# EAGLE board Lamp Logic Board_5 (EAGLE 9.4.2)

Size 45 x 81 mm. Coordinates in mm from the lower left corner, seen from the top.
Outline: 0,0 45,0 45,81 0,81 0,0
Copper layers (1*16): Top 0.035mm / dielectric 1.5mm / Bottom 0.035mm
Design rules "default": minimum track width 6mil, minimum drill 0.35mm, track to track 6mil, track to pad 6mil, pad to pad 6mil, via to via 6mil, smd to smd 6mil, copper to edge 40mil, drill to drill 6mil, minimum pad ring 10mil, minimum via ring 8mil, stop-mask expansion 4mil, vias tented up to drill 0mil, thermal gap 10mil

## Footprints (pad centres in the part's own frame; a part is rotated, then mirrored left to right if it is on the bottom)
3X8PINHEAD = drill 0.7 octagon: 1 0,0; 2 2.54,0; 3 5.08,0; 4 7.62,0; 5 10.16,0; 6 12.7,0; 7 15.24,0; 8 17.78,0; 9 0,-2.54; 10 2.54,-2.54; 11 5.08,-2.54; 12 7.62,-2.54; 13 10.16,-2.54; 14 12.7,-2.54; 15 15.24,-2.54; 16 17.78,-2.54; 17 0,-5.08; 18 2.54,-5.08; 19 5.08,-5.08; 20 7.62,-5.08; 21 10.16,-5.08; 22 12.7,-5.08; 23 15.24,-5.08; 24 17.78,-5.08
AMASS_XT60-M = drill 4.5 square: 1 -3.6,0 | drill 4.5: 2 3.6,0
SOT223 = smd 1.219 x 2.235: 1 -2.311,-3.099; 2 0,-3.099; 3 2.311,-3.099 | smd 3.6 x 2.2: 4 0,3.099
C0402 = smd 0.7 x 0.9: 1 -0.65,0; 2 0.65,0
C0805 = smd 1.3 x 1.5: 1 -0.95,0; 2 0.95,0
ENP2,0-5 = drill 0.813 pad 1.27 long: 1 -0.953,0; 2 0.953,0
CAP_EEFC_B = smd 2.21 x 1.575: 1 -2.159,0; 2 2.159,0
1X05 = drill 1.016 long: 1 -5.08,0; 2 -2.54,0; 3 0,0; 4 2.54,0; 5 5.08,0
DIL-08 = drill 0.813 long: 1 -3.81,-3.81; 2 -1.27,-3.81; 3 1.27,-3.81; 4 3.81,-3.81; 5 3.81,3.81; 6 1.27,3.81; 7 -1.27,3.81; 8 -3.81,3.81
SPIOLED_STADOFF = drill 0.6 octagon: CLK 18.39,2.5; CS 20.93,2.5; DC 23.47,2.5; DIN 15.85,2.5; GND 13.31,2.5; RST 26.01,2.5; VCC 10.77,2.5 | hole 2.5: 2.5,2.5; 34.5,2.5; 34.5,42.25; 2.75,42.5
R1206 = smd 1.6 x 1.803: 1 -1.422,0; 2 1.422,0
R0603 = smd 1 x 1.1: 1 -0.85,0; 2 0.85,0
0309/12 = drill 0.813 octagon: 1 -6.35,0; 2 6.35,0
EN11-HSM = drill 0.991 pad 1.499: 1 -2.489,7.874; 2 2.489,7.874; 3 0,7.874 | drill 1.092 pad 1.6: 4 -2.489,22.352; 5 2.489,22.352
TACTILE_SWITCH_SMD_6.0X3.5MM = smd 2.3 x 1.6: 1 -3.15,0; 2 3.15,0
TACTILE_SWITCH_SMD_12MM = smd 1.6 x 1.55: 1 6.975,-2.5; 2 -6.975,-2.5; 3 6.975,2.5; 4 -6.975,2.5
CM1624-08DE = smd 0.2 x 0.4: CLK 1,0; CMD 2.2,0; DATA0 0.6,0; DATA1 0.2,0; DATA2 3,0; DATA3 2.6,0; ESD1 1.4,0; ESD2 1.4,1.125; ESD3 1.775,1.125; SDCLK 1,1.125; SDCMD 2.2,1.125; SDDATA0 0.6,1.125; SDDATA1 0.2,1.125; SDDATA2 3,1.125; SDDATA3 2.6,1.125; VCC 1.8,0 | smd 3 x 0.35: GND 1.575,0.575
CON00218_8 = smd 0.813 x 1.676: 1 2.899,-7.387; 2 1.799,-7.387; 3 0.699,-7.387; 4 -0.401,-7.387; 5 -1.501,-7.387; 6 -2.601,-7.387; 7 -3.701,-7.387; 8 -4.801,-7.387 | smd 1.499 x 1.702: 9 -6.751,7.374; 10 6.751,7.374 | smd 1.295 x 1.397: 11 -6.859,1.577 | smd 1.295 x 1.295: 12 -6.859,-5.823 | smd 1.6 x 1.499: 13 -6.201,-7.476 | smd 1.702 x 1.499: 14 6.449,-7.476
2X6PINHEAD = drill 0.6 octagon: CS 6.35,3.81; DTR 1.27,1.27; GND 6.35,1.27; MISO 11.43,3.81; MOSI 8.89,3.81; RTS 1.27,3.81; RX0 8.89,1.27; SCK 3.81,3.81; TX0 11.43,1.27; VCC 3.81,1.27
DW20 = smd 1.981 x 0.559: 1 -4.686,5.715; 2 -4.686,4.445; 3 -4.686,3.175; 4 -4.686,1.905; 5 -4.686,0.635; 6 -4.686,-0.635; 7 -4.686,-1.905; 8 -4.686,-3.175; 9 -4.686,-4.445; 10 -4.686,-5.715; 11 4.686,-5.715; 12 4.686,-4.445; 13 4.686,-3.175; 14 4.686,-1.905; 15 4.686,-0.635; 16 4.686,0.635; 17 4.686,1.905; 18 4.686,3.175; 19 4.686,4.445; 20 4.686,5.715
XCVR_ESP32-WROVER-I = smd 1.45 x 0.93: 1 -8.81,8.26; 2 -8.81,6.99; 3 -8.81,5.72; 4 -8.81,4.45; 5 -8.81,3.18; 6 -8.81,1.91; 7 -8.81,0.64; 8 -8.81,-0.63; 9 -8.81,-1.9; 10 -8.81,-3.17; 11 -8.81,-4.44; 12 -8.81,-5.71; 13 -8.81,-6.98; 14 -8.81,-8.25; 15 -8.81,-9.52; 16 -8.81,-10.79; 17 -8.81,-12.06; 18 -8.81,-13.33; 19 -8.81,-14.6; 20 8.81,-14.6; 21 8.81,-13.33; 22 8.81,-12.06; 23 8.81,-10.79; 24 8.81,-9.52; 25 8.81,-8.25; 26 8.81,-6.98; 27 8.81,-5.71; 28 8.81,-4.44; 29 8.81,-3.17; 30 8.81,-1.9; 31 8.81,-0.63; 32 8.81,0.64; 33 8.81,1.91; 34 8.81,3.18; 35 8.81,4.45; 36 8.81,5.72; 37 8.81,6.99; 38 8.81,8.26 | smd 4 x 4: 39 -1.38,0.47

## Placement (x,y rotation side)
3X8_24_PIN_LED_OUTPUT  3X8PINHEAD  [3X8PINHEAD]  23.2,37.6 0 top
5V_POWER_INPUT  XT60-M  [AMASS_XT60-M]  5.3,34.8 270 top
5V_TO_3V3_REGULATOR  [SOT223]  25.2,55.4 180 bottom
C1  0.01uF  [C0402]  -7.4,75.2 270 top  (outside the outline)
C2  0.1uF  [C0805]  17.4,68.7 0 bottom
C3  1uF  [C0402]  26.9,61.3 90 bottom
C4  0.01uF  [C0402]  10.3,72.2 90 bottom
C5  0.1uF  [C0805]  31,57 90 bottom
C6  1uF  [C0402]  18.7,56.2 0 top
C7  1000uF  [ENP2,0-5]  13.8,34.8 270 top
C8  0.01uF  [C0402]  -12.4,75.2 270 top  (outside the outline)
C9  1uF  [CAP_EEFC_B]  29.8,50.9 270 bottom
C10  0.1uF  [C0805]  16,73 270 top
C11  0.1uF  [C0805]  -7.4,50.75 0 top  (outside the outline)
C12  100nF  [C0402]  -9.9,67.9 90 top  (outside the outline)
C13  1uF  [CAP_EEFC_B]  16.3,64.8 0 bottom
MIC_HEADER  [1X05]  7.45,73.73 90 top
MSGEQ7  MSGEQ7DIL  [DIL-08]  16.2,75.2 270 bottom
OLED_HEADER  SPIOLED_STANDOFF  [SPIOLED_STADOFF]  0.23,43.77 90 bottom
R1  330  [R1206]  -7.3,67.9 270 top  (outside the outline)
R2  330  [R1206]  18.6,44.8 270 top
R3  330  [R1206]  21.6,44.8 270 top
R4  330  [R1206]  24.6,44.8 270 top
R5  330  [R1206]  27.5,44.8 270 top
R6  330  [R1206]  30.5,44.8 270 top
R7  330  [R1206]  33.4,44.8 270 top
R8  330  [R1206]  36.4,44.8 270 top
R9  330  [R1206]  39.4,44.8 270 top
R10  330  [R1206]  8.2,65.6 0 bottom
R11  [R0603]  -9.9,75.2 90 top  (outside the outline)
R12  12k  [R0603]  10.3,69.1 270 bottom
R13  330  [R1206]  -7.4,55.45 0 top  (outside the outline)
R14  12k  [R0603]  -12.35,52.85 270 top  (outside the outline)
R15  75k  [0309/12]  19.2,34.8 270 top
R16  330  [R1206]  -12.5,67.9 90 top  (outside the outline)
ROTARY_ENCODER  EN11-HSM1AF15  [EN11-HSM]  -9.9,86 180 bottom  (outside the outline)
S1  [TACTILE_SWITCH_SMD_6.0X3.5MM]  16.2,59.1 0 top
S3  MOMENTARY-SWITCH-SPST-SMD-12MM  [TACTILE_SWITCH_SMD_12MM]  -10,52.9 180 bottom  (outside the outline)
SD_CARD_FILTER  CM1624-08DE  [CM1624-08DE]  31.1,61.4 0 bottom
SD_CARD_READER  LLC  [CON00218_8]  32.7,71.7 0 bottom
SERIAL/SPI_HEADER  2X6PINHEAD  [2X6PINHEAD]  6.1,63.3 270 top
SN74HCT245DWR  SN74HCT245DWR  [DW20]  38.1,55.8 0 bottom
U1  ESP32-WROVER-IB  [XCVR_ESP32-WROVER-I]  31.3,64.9 0 top

## Library data of the parts
3X8_24_PIN_LED_OUTPUT = 3X8PINHEAD
5V_POWER_INPUT = XT60-M; AVAILABILITY: Unavailable; MF: AMASS; MP: XT60-M; PACKAGE: Package Analog Devices; PRICE: None
5V_TO_3V3_REGULATOR = lm1117; MF: Texas Instruments; MPN: LM1117MP-1.8; OC_FARNELL: 1469053; OC_NEWARK: 41K3467
C1-C6 C8 C10-C12 R1-R16 = resistor
C7 = cap-pan40
C9 C13 = EEE-FC1V1R0R; MANUFACTURER_PART_NUMBER: EEEFC1V1R0R; VENDOR: Panasonic
MIC_HEADER = pinhead
MSGEQ7 = MSGEQ7; DESCRIPTION: Seven Band Graphic Equalizer Display Filter; DIGI-KEY_PART_NUMBER: 1568-1544-ND; DIGI-KEY_PURCHASE_URL: https://www.digikey.com/product-detail/en/sparkfun-electronics/DEV-13116/1568-1544-ND/5764478?utm_source=snapeda&utm_medium=aggregator&utm_campaign=symbol; MF: SparkFun Electronics; MP: MSGEQ7; PACKAGE: SOIC-8 Mixed Signal Integration
OLED_HEADER = SPIOLED-STANDOFF
ROTARY_ENCODER = untitled
S1 = SparkFun-Switches; PROD_ID: SWCH-00815; SF_SKU: COM-08229
S3 = SparkFun-Switches; PROD_ID: SWCH-11967; SF_SKU: COM-12993
SD_CARD_FILTER = CM1624-08DE
SD_CARD_READER = 5027740891; MANUFACTURER_PART_NUMBER: LLC; VENDOR: Molex Connector Corporation
SERIAL/SPI_HEADER = 2X4PINHEAD
SN74HCT245DWR = SN74HCT245DWR ; MANUFACTURER_PART_NUMBER: SN74HCT245DWR; VENDOR: Texas Instruments
U1 = ESP32-WROVER-I; AVAILABILITY: Unavailable; DESCRIPTION: Module: combo; GPIO, I2C x2, I2S x2, SDIO, SPI x3, UART x3; U.FL; MF: Espressif Systems; MP: ESP32-WROVER-I; PACKAGE: Module Espressif Systems; PRICE: None

## Nets
AR: MIC_HEADER.5
BEST_BUTTON: C11.1 R13.1 R14.2 U1.8
EN: R10.1 R12.2 SERIAL/SPI_HEADER.DTR U1.3
GAIN: MIC_HEADER.3
GND: 3X8_24_PIN_LED_OUTPUT.1 3X8_24_PIN_LED_OUTPUT.2 3X8_24_PIN_LED_OUTPUT.3 3X8_24_PIN_LED_OUTPUT.4 3X8_24_PIN_LED_OUTPUT.5 3X8_24_PIN_LED_OUTPUT.6 3X8_24_PIN_LED_OUTPUT.7 3X8_24_PIN_LED_OUTPUT.8 5V_POWER_INPUT.1 5V_TO_3V3_REGULATOR.1 C1.2 C2.2 C3.2 C5.2 C6.2 C7.1 C8.2 C9.2 C10.2 C11.2 C12.1 C13.2 MIC_HEADER.1 MSGEQ7.2 OLED_HEADER.GND R15.1 ROTARY_ENCODER.4 S1.2 S3.3 SD_CARD_FILTER.GND SD_CARD_READER.6 SD_CARD_READER.9 SD_CARD_READER.10 SD_CARD_READER.11 SD_CARD_READER.13 SD_CARD_READER.14 SERIAL/SPI_HEADER.GND SN74HCT245DWR.10 SN74HCT245DWR.19 U1.1 U1.15 U1.38 U1.39
HEADER_CS: R1.1 SERIAL/SPI_HEADER.CS U1.35
LEDS1_3V3: SN74HCT245DWR.2 U1.33
LEDS1_5V: 3X8_24_PIN_LED_OUTPUT.9 R2.2
LEDS2_3V3: SN74HCT245DWR.3 U1.31
LEDS2_5V: 3X8_24_PIN_LED_OUTPUT.10 R3.2
LEDS3_3V3: SN74HCT245DWR.4 U1.30
LEDS3_5V: 3X8_24_PIN_LED_OUTPUT.11 R4.2
LEDS4_3V3: SN74HCT245DWR.5 U1.23
LEDS4_5V: 3X8_24_PIN_LED_OUTPUT.12 R5.2
LEDS5_3V3: SN74HCT245DWR.6 U1.24
LEDS5_5V: 3X8_24_PIN_LED_OUTPUT.13 R6.2
LEDS6_3V3: SERIAL/SPI_HEADER.RTS SN74HCT245DWR.7 U1.25
LEDS6_5V: 3X8_24_PIN_LED_OUTPUT.14 R7.2
LEDS7_3V3: SN74HCT245DWR.8 U1.26
LEDS7_5V: 3X8_24_PIN_LED_OUTPUT.15 R8.2
LEDS8_3V3: SN74HCT245DWR.9 U1.29
LEDS8_5V: 3X8_24_PIN_LED_OUTPUT.16 R9.2
MIC: C4.2 MIC_HEADER.4 U1.11
MISO: SD_CARD_FILTER.SDDATA0 SERIAL/SPI_HEADER.MISO U1.14
MOSI: OLED_HEADER.DIN SD_CARD_FILTER.SDCMD SERIAL/SPI_HEADER.MOSI U1.16
MSGEQ_OUT: MSGEQ7.3 U1.4
MSGEQ_RST: MSGEQ7.7 U1.12
MSGEQ_STROBE: MSGEQ7.4 U1.10
N$1: R9.1 SN74HCT245DWR.18
N$3: C4.1 MSGEQ7.5
N$4: C10.1 MSGEQ7.6
N$5: R16.1 ROTARY_ENCODER.5
N$6: R8.1 SN74HCT245DWR.17
N$7: R13.2 S3.1
N$8: SD_CARD_FILTER.ESD1
N$9: R10.2 S1.1
N$10: R7.1 SN74HCT245DWR.16
N$11: R6.1 SN74HCT245DWR.15
N$12: R5.1 SN74HCT245DWR.14
N$13: R4.1 SN74HCT245DWR.13
N$14: R3.1 SN74HCT245DWR.12
N$15: R2.1 SN74HCT245DWR.11
OLED_CS: OLED_HEADER.CS U1.37
OLED_DC: OLED_HEADER.DC U1.9
OLED_RESET: OLED_HEADER.RST
ROTARY_BUTTON_OUT: C12.2 R11.1 R16.2 U1.6
ROTARY_OUT_A: C8.1 ROTARY_ENCODER.1 U1.5
ROTARY_OUT_B: C1.1 ROTARY_ENCODER.2 U1.7
RX0: SERIAL/SPI_HEADER.RX0 U1.34
SCK: OLED_HEADER.CLK SD_CARD_FILTER.SDCLK SERIAL/SPI_HEADER.SCK U1.13
SD_CMD: SD_CARD_FILTER.CMD SD_CARD_READER.3
SD_CS: SD_CARD_FILTER.SDDATA3 U1.36
SD_D0: SD_CARD_FILTER.DATA0 SD_CARD_READER.7
SD_D1: SD_CARD_FILTER.DATA1 SD_CARD_READER.8
SD_D2: SD_CARD_FILTER.DATA2 SD_CARD_READER.1
SD_D3: SD_CARD_FILTER.DATA3 SD_CARD_READER.2
SD_SCK: SD_CARD_FILTER.CLK SD_CARD_READER.5
TX0: R1.2 SERIAL/SPI_HEADER.TX0
VDD3V3: 5V_TO_3V3_REGULATOR.2 5V_TO_3V3_REGULATOR.4 C2.1 C6.1 C13.1 MIC_HEADER.2 MSGEQ7.1 OLED_HEADER.VCC R11.2 R12.1 R14.1 ROTARY_ENCODER.3 SD_CARD_FILTER.VCC SD_CARD_READER.4 SERIAL/SPI_HEADER.VCC U1.2
VDD5V: 3X8_24_PIN_LED_OUTPUT.17 3X8_24_PIN_LED_OUTPUT.18 3X8_24_PIN_LED_OUTPUT.19 3X8_24_PIN_LED_OUTPUT.20 3X8_24_PIN_LED_OUTPUT.21 3X8_24_PIN_LED_OUTPUT.22 3X8_24_PIN_LED_OUTPUT.23 3X8_24_PIN_LED_OUTPUT.24 5V_POWER_INPUT.2 5V_TO_3V3_REGULATOR.3 C3.1 C5.1 C7.2 C9.1 R15.2 SN74HCT245DWR.1 SN74HCT245DWR.20

## Tracks (layer width: path | path; a pad name or v marks a point on that pad's centre or on a via)
BEST_BUTTON  (3 unrouted)
EN  (3 unrouted)
GND  (42 unrouted)
HEADER_CS  (2 unrouted)
LEDS1_3V3  (1 unrouted)
LEDS1_5V  (1 unrouted)
LEDS2_3V3  (1 unrouted)
LEDS2_5V  (1 unrouted)
LEDS3_3V3  (1 unrouted)
LEDS3_5V  (1 unrouted)
LEDS4_3V3  (1 unrouted)
LEDS4_5V  (1 unrouted)
LEDS5_3V3  (1 unrouted)
LEDS5_5V  (1 unrouted)
LEDS6_3V3  (2 unrouted)
LEDS6_5V  (1 unrouted)
LEDS7_3V3  (1 unrouted)
LEDS7_5V  (1 unrouted)
LEDS8_3V3  (1 unrouted)
LEDS8_5V  (1 unrouted)
MIC  (2 unrouted)
MISO  (2 unrouted)
MOSI  (3 unrouted)
MSGEQ_OUT  (1 unrouted)
MSGEQ_RST  (1 unrouted)
MSGEQ_STROBE  (1 unrouted)
N$1  (1 unrouted)
N$3  (1 unrouted)
N$4  (1 unrouted)
N$5  (1 unrouted)
N$6  (1 unrouted)
N$7  (1 unrouted)
N$9  (1 unrouted)
N$10  (1 unrouted)
N$11  (1 unrouted)
N$12  (1 unrouted)
N$13  (1 unrouted)
N$14  (1 unrouted)
N$15  (1 unrouted)
OLED_CS  (1 unrouted)
OLED_DC  (1 unrouted)
ROTARY_BUTTON_OUT  (3 unrouted)
ROTARY_OUT_A  (2 unrouted)
ROTARY_OUT_B  (2 unrouted)
RX0  (1 unrouted)
SCK  (3 unrouted)
SD_CMD  (1 unrouted)
SD_CS  (1 unrouted)
SD_D0  (1 unrouted)
SD_D1  (1 unrouted)
SD_D2  (1 unrouted)
SD_D3  (1 unrouted)
SD_SCK  (1 unrouted)
TX0  (1 unrouted)
VDD3V3  (15 unrouted)
VDD5V  (16 unrouted)

## Text on the board
tNames: CM1624-08DE